# Altium PCB PCB_3U_RJ45.PCBDOC (part 1 of 2)
Units mil, origin at the board's own origin, x right, y up, seen from the top; angles counter-clockwise.
Board outline 2496.06 x 3937 mil, 4 copper layers (TopLayer, MidLayer2, Internal Plane 1, BottomLayer), stack 44.239 mil thick; 189 components, 140 nets, 780 pads, 257 vias.
Unrouted connection lines stored in the file: 406.
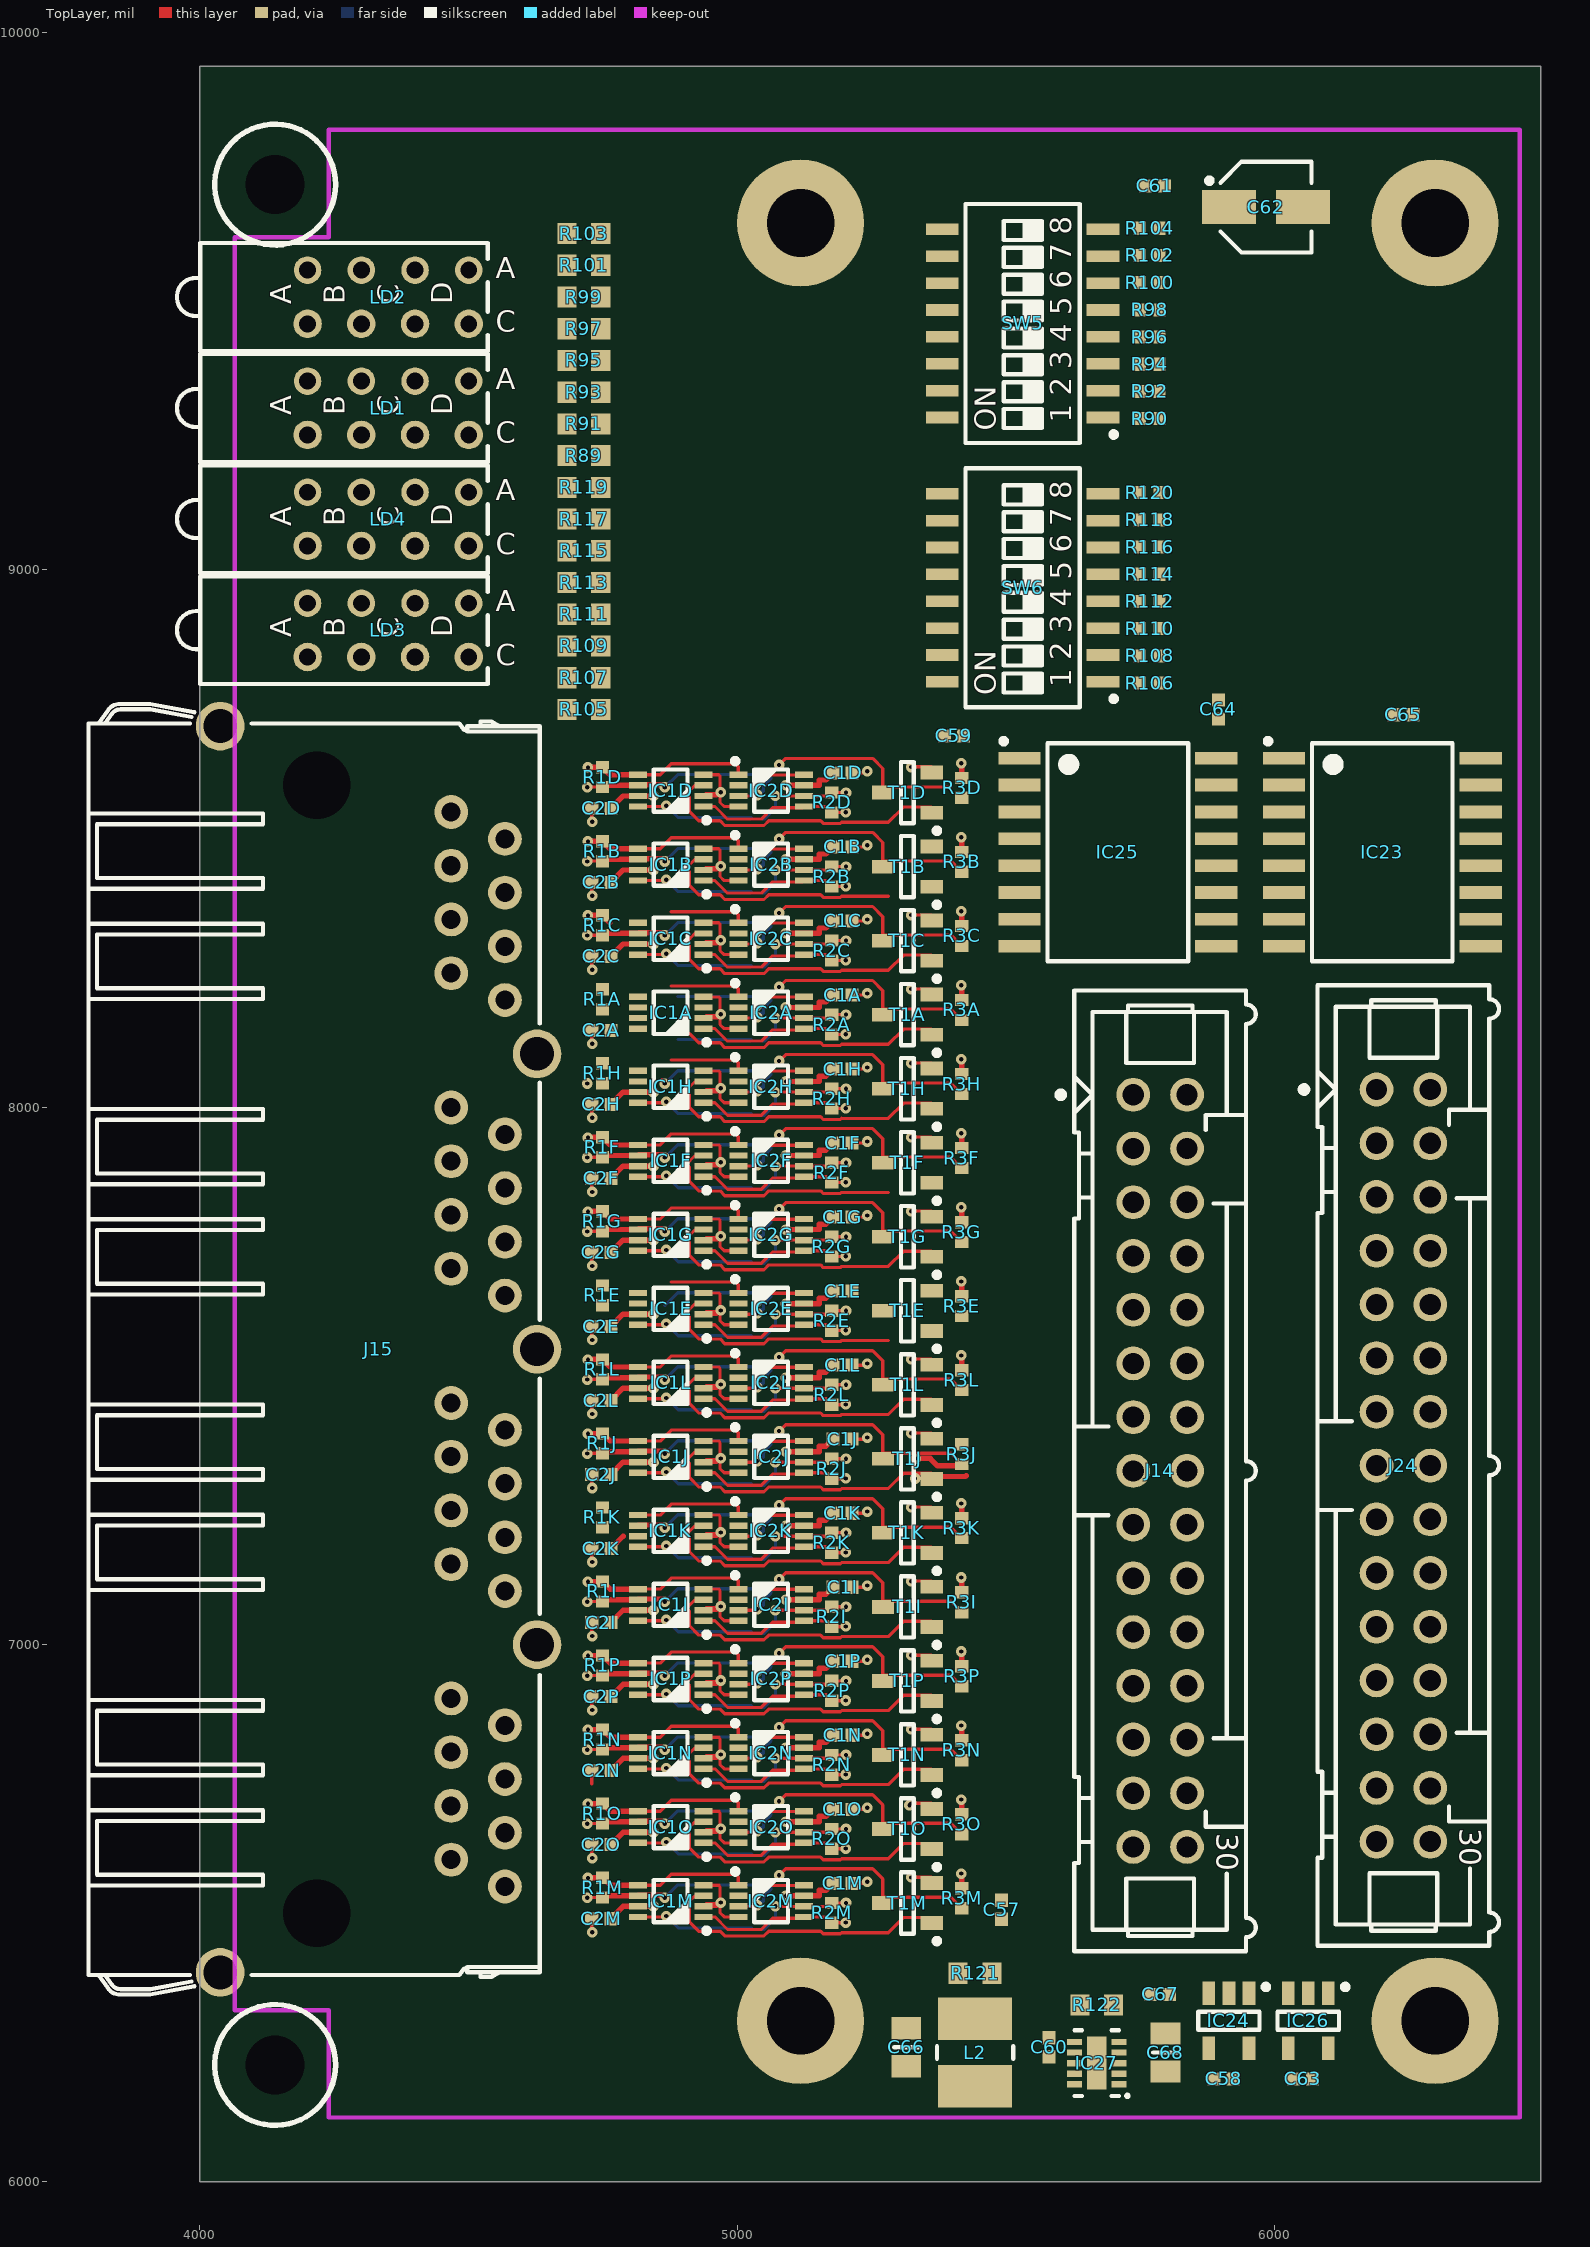
[diagram p0: TopLayer view]
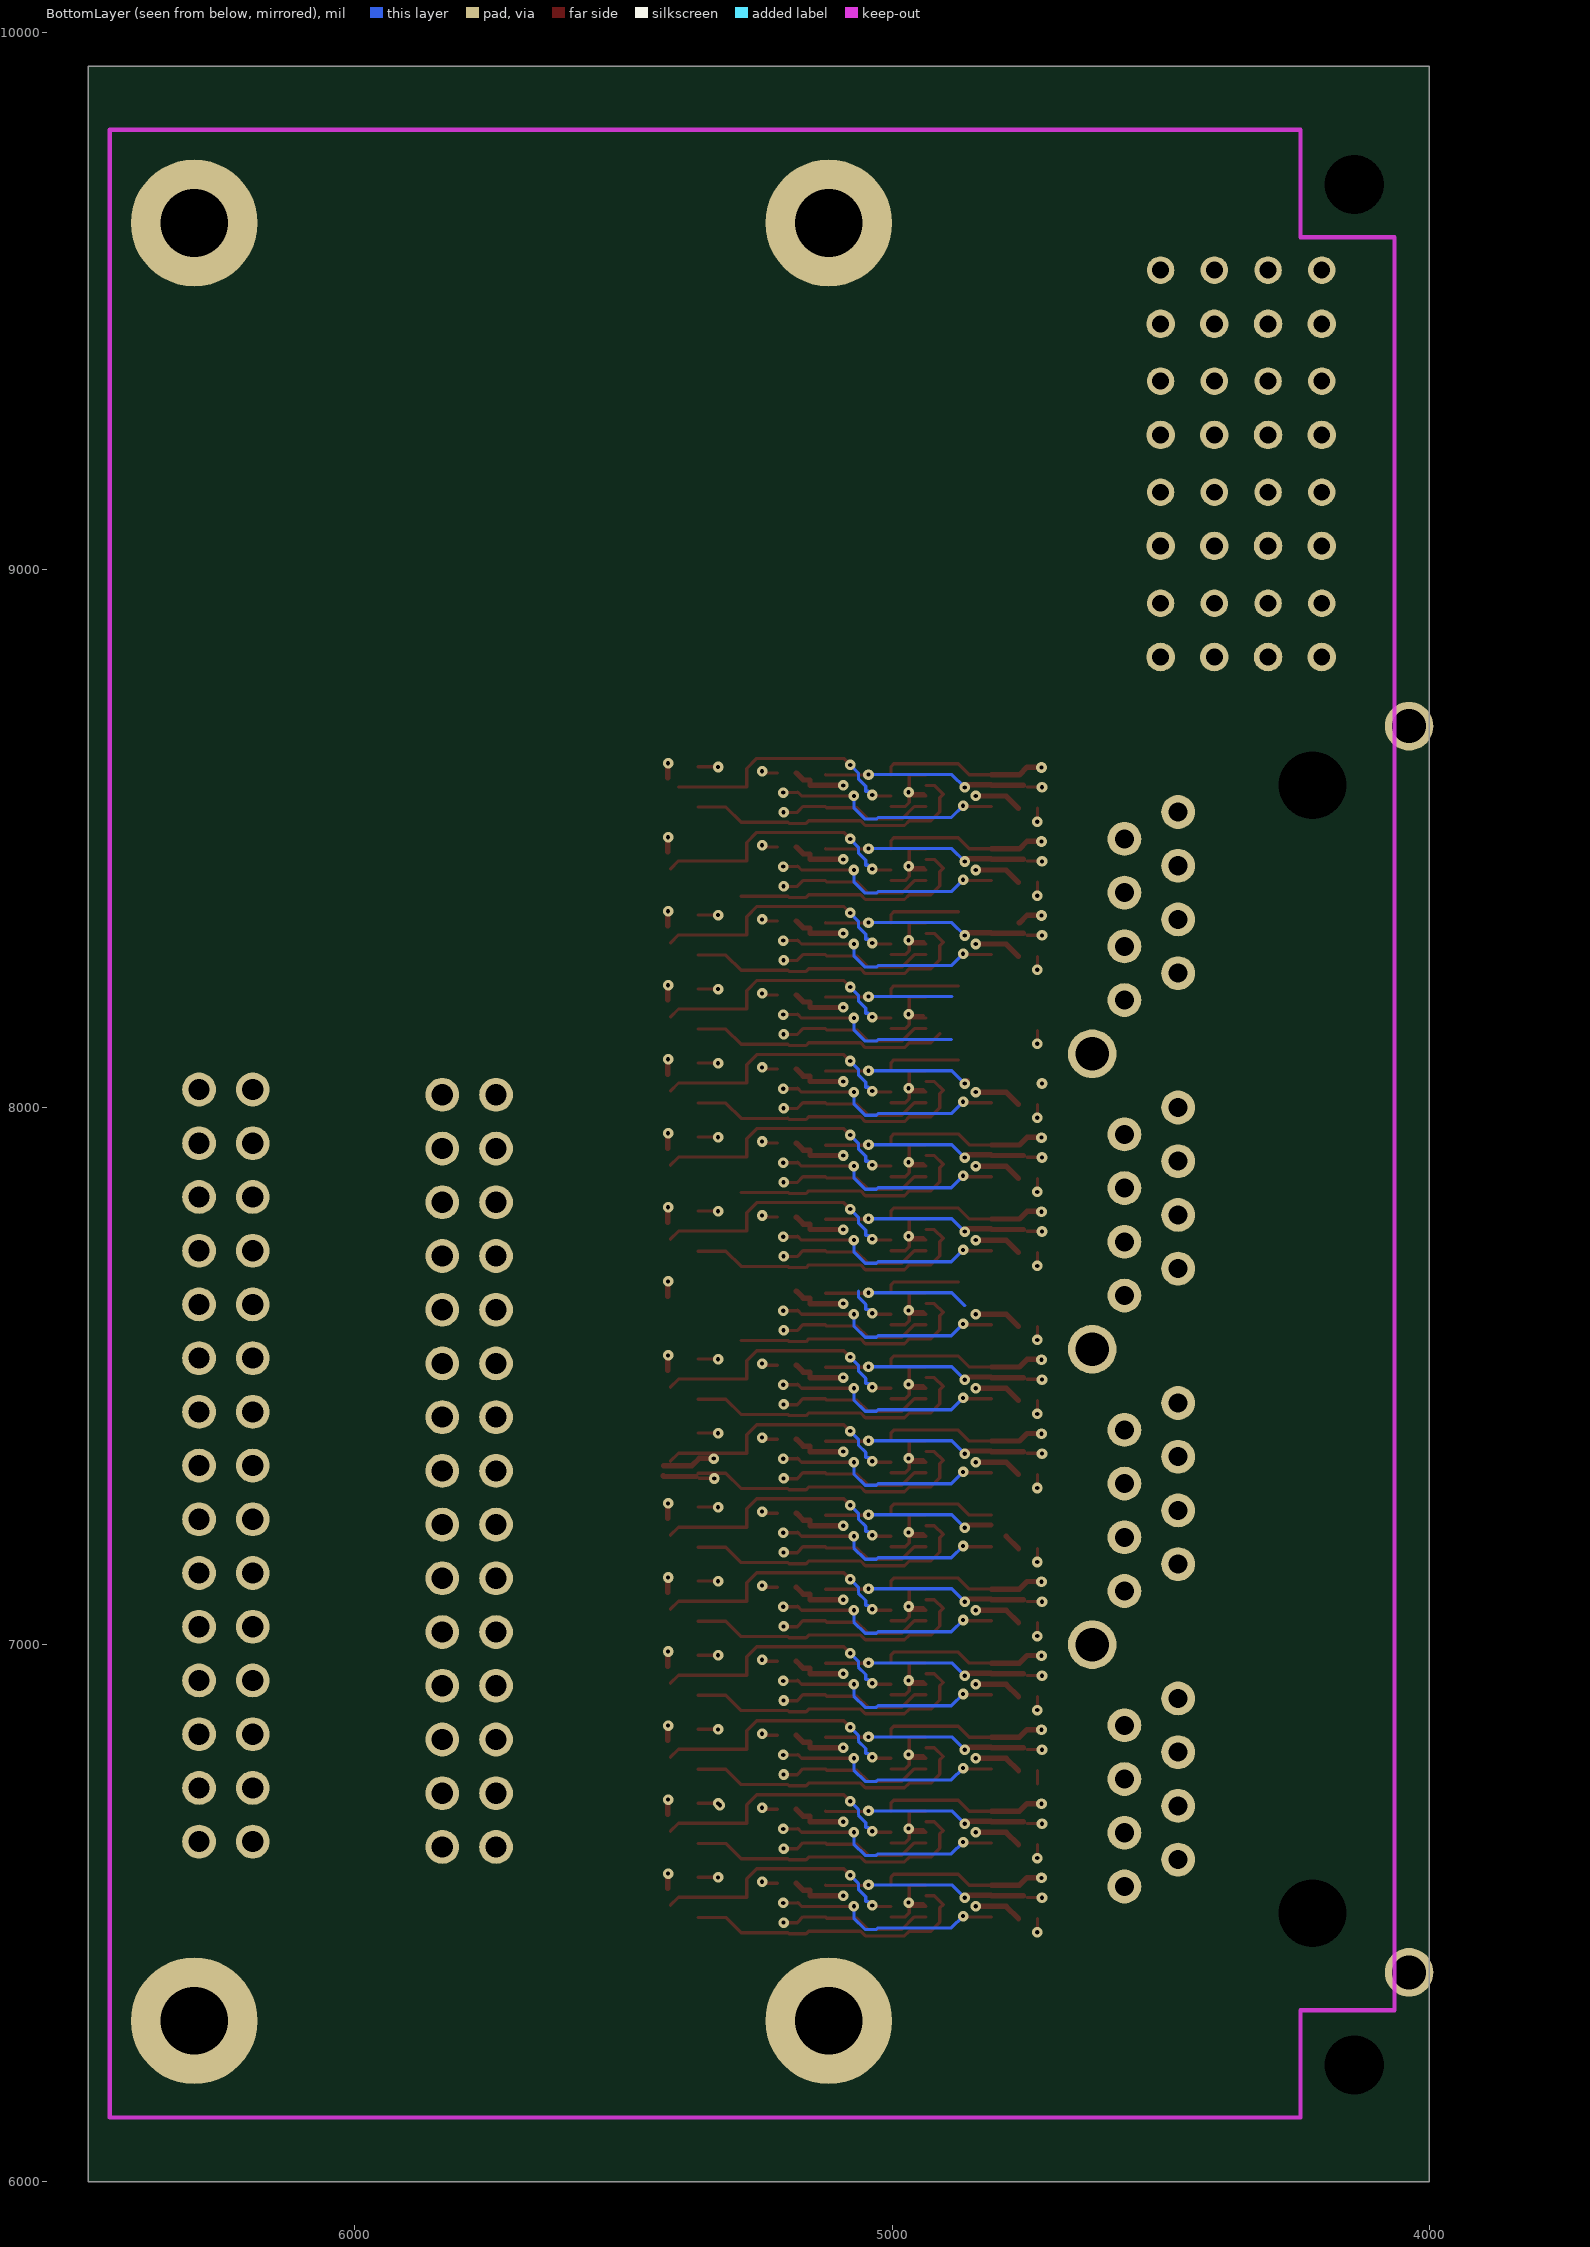
[diagram p1: BottomLayer view, seen from below]
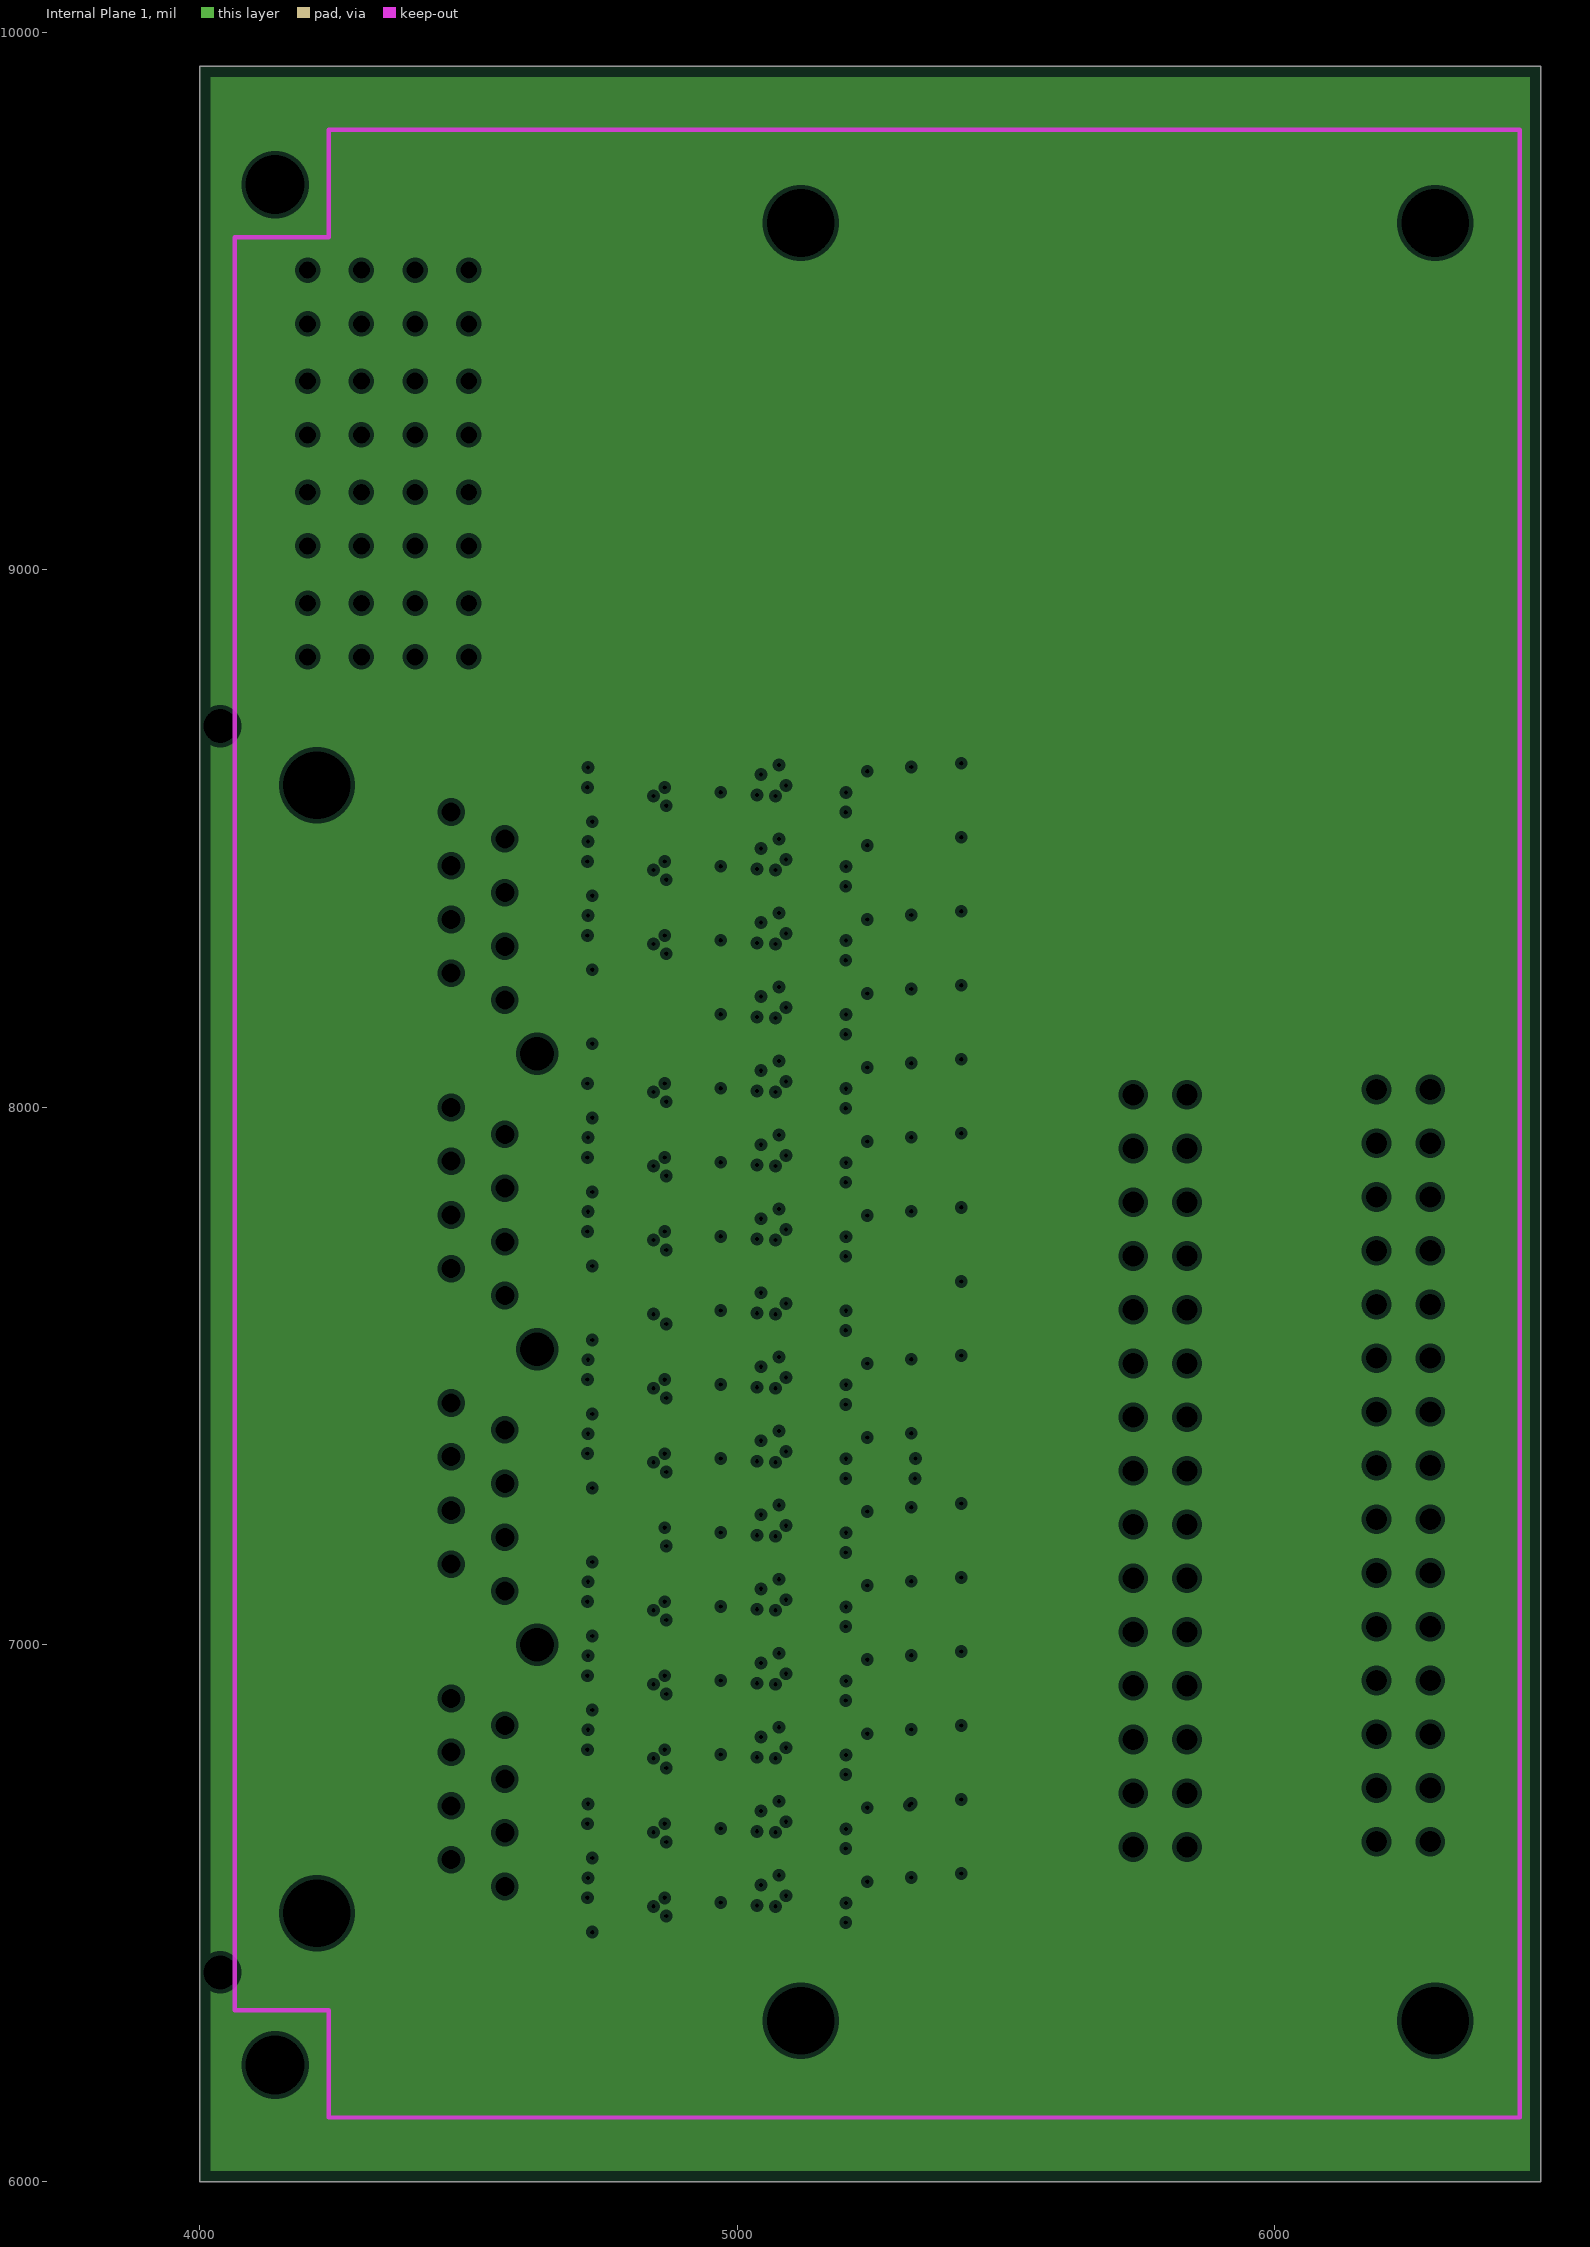
[diagram p2: Internal Plane 1, clearances drawn from the general rule]

## Layer stack, top to bottom
TopSolder: solder mask 0.4, Solder Resist, Dk 3.5
TopLayer: signal copper 1.4
Dielectric1: core 23.622, FR-4, Dk 4.8
MidLayer2: signal copper 1.4
Dielectric 3: prepreg 5, Dk 4.2
Internal Plane 1: plane copper 1.417
Dielectric2: core 10, FR-4, Dk 4.2
BottomLayer: signal copper 1.4
BottomSolder: solder mask 0.4, Solder Resist, Dk 3.5

## Board outline
4000,6000 6496.06,6000 6496.06,9937 4000,9937

## Design rules (kind name [scope] priority, off if disabled: settings)
AcuteAngle [All] p1: minimum=6.00000000000000E+0001 checktracksonly=FALSE
Clearance Clearance_poly [(InPolygon)] p1: gap=23.62
Clearance [All] p2: gap=6
DiffPairsRouting [All] p1: maxlimit=20 minlimit=15 mostfreqgap=17 toplayer_minwidth=15 toplayer_maxwidth=15 toplayer_prefwidth=15 midlayer2_minwidth=15 midlayer2_maxwidth=15 midlayer2_prefwidth=15 bottomlayer_minwidth=15 bottomlayer_maxwidth=15 bottomlayer_prefwidth=15 maxuncoupledlength=500
HoleSize [All] p1: absolutevalues=TRUE maxlimit=200 minlimit=1 maxpercent=80.000 minpercent=20.000
MinimumSolderMaskSliver [All] p1: minsoldermaskwidth=0
MinimumSolderMaskSliver SilkscreenOverComponentPads [All] p2: minsoldermaskwidth=10
PlaneClearance [All] p1: clearance=8
PlaneConnect PlaneConnect_pad [(InPadClass('All Pads'))] p1: planeconnectstyle=Relief reliefexpansion=20 reliefentries=4 reliefconductorwidth=10 reliefairgap=10
PlaneConnect [All] p2: planeconnectstyle=Direct reliefexpansion=20 reliefentries=4 reliefconductorwidth=10 reliefairgap=10
PolygonConnect PolygonConnect_pad [(InPadClass('All Pads'))] p1: connectstyle=Relief reliefconductorwidth=10 reliefentries=4 polygonreliefangle="90 Angle" airgapwidth=10
PolygonConnect [All] p2: connectstyle=Direct reliefconductorwidth=10 reliefentries=4 polygonreliefangle="90 Angle" airgapwidth=10
RoomDefinition U_LVDS_repeater16 [InComponentClass('U_LVDS_repeater16')] p1: confinementstyle=ConfineIn formatcopy=TRUE lockcomponents=FALSE outline 5454.57,7000.73 4706.54,7000.73 4706.54,6862.94 5454.57,6862.94
RoomDefinition U_LVDS_repeater15 [InComponentClass('U_LVDS_repeater15')] p2: confinementstyle=ConfineIn formatcopy=TRUE lockcomponents=FALSE outline 5454.57,6725.14 4706.54,6725.14 4706.54,6587.35 5454.57,6587.35
RoomDefinition U_LVDS_repeater14 [InComponentClass('U_LVDS_repeater14')] p3: confinementstyle=ConfineIn formatcopy=TRUE lockcomponents=FALSE outline 5454.57,6862.94 4706.54,6862.94 4706.54,6725.14 5454.57,6725.14
RoomDefinition U_LVDS_repeater13 [InComponentClass('U_LVDS_repeater13')] p4: confinementstyle=ConfineIn formatcopy=TRUE lockcomponents=FALSE outline 5454.57,6587.35 4706.54,6587.35 4706.54,6449.55 5454.57,6449.55
RoomDefinition U_LVDS_repeater12 [InComponentClass('U_LVDS_repeater12')] p5: confinementstyle=ConfineIn formatcopy=TRUE lockcomponents=FALSE outline 5454.57,7551.91 4706.54,7551.91 4706.54,7414.12 5454.57,7414.12
RoomDefinition U_LVDS_repeater11 [InComponentClass('U_LVDS_repeater11')] p6: confinementstyle=ConfineIn formatcopy=TRUE lockcomponents=FALSE outline 5454.57,7276.32 4706.54,7276.32 4706.54,7138.53 5454.57,7138.53
RoomDefinition U_LVDS_repeater10 [InComponentClass('U_LVDS_repeater10')] p7: confinementstyle=ConfineIn formatcopy=TRUE lockcomponents=FALSE outline 5454.57,7414.12 4706.54,7414.12 4706.54,7276.32 5454.57,7276.32
RoomDefinition U_LVDS_repeater9 [InComponentClass('U_LVDS_repeater9')] p8: confinementstyle=ConfineIn formatcopy=TRUE lockcomponents=FALSE outline 5454.57,7138.53 4706.54,7138.53 4706.54,7000.73 5454.57,7000.73
RoomDefinition U_LVDS_repeater8 [InComponentClass('U_LVDS_repeater8')] p9: confinementstyle=ConfineIn formatcopy=TRUE lockcomponents=FALSE outline 5454.57,8103.09 4706.54,8103.09 4706.54,7965.3 5454.57,7965.3
RoomDefinition U_LVDS_repeater7 [InComponentClass('U_LVDS_repeater7')] p10: confinementstyle=ConfineIn formatcopy=TRUE lockcomponents=FALSE outline 5454.57,7827.5 4706.54,7827.5 4706.54,7689.71 5454.57,7689.71
RoomDefinition U_LVDS_repeater6 [InComponentClass('U_LVDS_repeater6')] p11: confinementstyle=ConfineIn formatcopy=TRUE lockcomponents=FALSE outline 5454.57,7965.3 4706.54,7965.3 4706.54,7827.5 5454.57,7827.5
RoomDefinition U_LVDS_repeater5 [InComponentClass('U_LVDS_repeater5')] p12: confinementstyle=ConfineIn formatcopy=TRUE lockcomponents=FALSE outline 5454.57,7689.71 4706.54,7689.71 4706.54,7551.91 5454.57,7551.91
RoomDefinition U_LVDS_repeater4 [InComponentClass('U_LVDS_repeater4')] p13: confinementstyle=ConfineIn formatcopy=TRUE lockcomponents=FALSE outline 5454.57,8654.28 4706.54,8654.28 4706.54,8516.48 5454.57,8516.48
RoomDefinition U_LVDS_repeater3 [InComponentClass('U_LVDS_repeater3')] p14: confinementstyle=ConfineIn formatcopy=TRUE lockcomponents=FALSE outline 5454.57,8378.69 4706.54,8378.69 4706.54,8240.89 5454.57,8240.89
RoomDefinition U_LVDS_repeater2 [InComponentClass('U_LVDS_repeater2')] p15: confinementstyle=ConfineIn formatcopy=TRUE lockcomponents=FALSE outline 5454.57,8516.48 4706.54,8516.48 4706.54,8378.69 5454.57,8378.69
RoomDefinition U_LVDS_repeater1 [InComponentClass('U_LVDS_repeater1')] p16: confinementstyle=ConfineIn formatcopy=TRUE lockcomponents=FALSE outline 5454.57,8240.89 4706.54,8240.89 4706.54,8103.09 5454.57,8103.09
RoomDefinition PCB_3U_RJ45 [InComponentClass('PCB_3U_RJ45')] p17: confinementstyle=ConfineIn formatcopy=TRUE lockcomponents=FALSE outline 6541,6055 7775.59,6055 7775.59,8581 6541,8581
RoutingVias [All] p1: holewidth=7.87 width=19.68 viastyle="Through Hole" minholewidth=7.87 minwidth=19.68 maxholewidth=19.68 maxwidth=39.37
SilkToSilkClearance [All] p1: silktosilkclearance=0
SolderMaskExpansion [All] p1: expansion=4
ViasUnderSMD ViasUnderSMD_allow [InComponent('IC18') or InComponent('IC10') or InComponent('IC13') or InComponent('IC14') or InComponent('IC15')] p1: allowed=TRUE
ViasUnderSMD [All] p2: allowed=FALSE
Width Width_1 [(InDifferentialPairClass('All Differential Pairs'))] p1: maxlimit=8 minlimit=8 preferedwidth=8
Width [All] p2: maxlimit=100 minlimit=6 preferedwidth=10
24 further rules are at their usual default settings.

## Classes and differential pairs
channel class LVDS_repeater: U_LVDS_repeater1 U_LVDS_repeater2 U_LVDS_repeater3 U_LVDS_repeater4 U_LVDS_repeater5 U_LVDS_repeater6 U_LVDS_repeater7 U_LVDS_repeater8 U_LVDS_repeater9 U_LVDS_repeater10 U_LVDS_repeater11 U_LVDS_repeater12 U_LVDS_repeater13 U_LVDS_repeater14 U_LVDS_repeater15 U_LVDS_repeater16
component class U_LVDS_repeater16: C1P C2P IC1P IC2P R1P R2P R3P T1P
component class U_LVDS_repeater15: C1O C2O IC1O IC2O R1O R2O R3O T1O
component class U_LVDS_repeater14: C1N C2N IC1N IC2N R1N R2N R3N T1N
component class U_LVDS_repeater13: C1M C2M IC1M IC2M R1M R2M R3M T1M
component class U_LVDS_repeater12: C1L C2L IC1L IC2L R1L R2L R3L T1L
component class U_LVDS_repeater11: C1K C2K IC1K IC2K R1K R2K R3K T1K
component class U_LVDS_repeater10: C1J C2J IC1J IC2J R1J R2J R3J T1J
component class U_LVDS_repeater9: C1I C2I IC1I IC2I R1I R2I R3I T1I
component class U_LVDS_repeater8: C1H C2H IC1H IC2H R1H R2H R3H T1H
component class U_LVDS_repeater7: C1G C2G IC1G IC2G R1G R2G R3G T1G
component class U_LVDS_repeater6: C1F C2F IC1F IC2F R1F R2F R3F T1F
component class U_LVDS_repeater5: C1E C2E IC1E IC2E R1E R2E R3E T1E
component class U_LVDS_repeater4: C1D C2D IC1D IC2D R1D R2D R3D T1D
component class U_LVDS_repeater3: C1C C2C IC1C IC2C R1C R2C R3C T1C
component class U_LVDS_repeater2: C1B C2B IC1B IC2B R1B R2B R3B T1B
component class U_LVDS_repeater1: C1A C2A IC1A IC2A R1A R2A R3A T1A
component class PCB_3U_RJ45: C5 C11 C12 C57 C58 C59 C60 C61 C62 C63 C64 C65 C66 C67 C68 IC4 IC23 IC24 IC25 IC26 IC27 J4 J14 J15 J24 L2 LD1 LD2 LD3 LD4 R4 R36 R37 R89 R90 R91 R92 R93 R94 R95 R96 R97 R98 R99 R100 R101 R102 R103 R104 R105 R106 R107 R108 R109 R110 R111 R112 R113 R114 R115 R116 R117 R118 R119 R120 R121 R122 SW5 SW6

## Components (designator, comment, footprint, x,y, rotation, side; value= is the part's Value field where it differs from the comment)
C1A "100nF" CAPC1005X55N 5196.13,8208.58 r180 top (schematic designator C1)
C1B "100nF" CAPC1005X55N 5196.13,8484.17 r180 top (schematic designator C1)
C1C "100nF" CAPC1005X55N 5196.13,8346.38 r180 top (schematic designator C1)
C1D "100nF" CAPC1005X55N 5196.13,8621.97 r180 top (schematic designator C1)
C1E "100nF" CAPC1005X55N 5196.13,7657.4 r180 top (schematic designator C1)
C1F "100nF" CAPC1005X55N 5196.13,7932.99 r180 top (schematic designator C1)
C1G "100nF" CAPC1005X55N 5196.13,7795.2 r180 top (schematic designator C1)
C1H "100nF" CAPC1005X55N 5196.13,8070.79 r180 top (schematic designator C1)
C1I "100nF" CAPC1005X55N 5196.13,7106.22 r180 top (schematic designator C1)
C1J "100nF" CAPC1005X55N 5196.13,7381.81 r180 top (schematic designator C1)
C1K "100nF" CAPC1005X55N 5196.13,7244.02 r180 top (schematic designator C1)
C1L "100nF" CAPC1005X55N 5196.13,7519.61 r180 top (schematic designator C1)
C1M "100nF" CAPC1005X55N 5196.13,6555.04 r180 top (schematic designator C1)
C1N "100nF" CAPC1005X55N 5196.13,6830.63 r180 top (schematic designator C1)
C1O "100nF" CAPC1005X55N 5196.13,6692.83 r180 top (schematic designator C1)
C1P "100nF" CAPC1005X55N 5196.13,6968.43 r180 top (schematic designator C1)
C2A "100nF" CAPC1005X55N 4747.13,8142.74 r0 top (schematic designator C2)
C2B "100nF" CAPC1005X55N 4747.13,8418.33 r0 top (schematic designator C2)
C2C "100nF" CAPC1005X55N 4747.13,8280.54 r0 top (schematic designator C2)
C2D "100nF" CAPC1005X55N 4747.13,8556.13 r0 top (schematic designator C2)
C2E "100nF" CAPC1005X55N 4747.13,7591.56 r0 top (schematic designator C2)
C2F "100nF" CAPC1005X55N 4747.13,7867.15 r0 top (schematic designator C2)
C2G "100nF" CAPC1005X55N 4747.13,7729.35 r0 top (schematic designator C2)
C2H "100nF" CAPC1005X55N 4747.13,8004.94 r0 top (schematic designator C2)
C2I "100nF" CAPC1005X55N 4747.13,7040.38 r0 top (schematic designator C2)
C2J "100nF" CAPC1005X55N 4747.13,7315.97 r0 top (schematic designator C2)
C2K "100nF" CAPC1005X55N 4747.13,7178.17 r0 top (schematic designator C2)
C2L "100nF" CAPC1005X55N 4747.13,7453.76 r0 top (schematic designator C2)
C2M "100nF" CAPC1005X55N 4747.13,6489.2 r0 top (schematic designator C2)
C2N "100nF" CAPC1005X55N 4747.13,6764.79 r0 top (schematic designator C2)
C2O "100nF" CAPC1005X55N 4747.13,6626.99 r0 top (schematic designator C2)
C2P "100nF" CAPC1005X55N 4747.13,6902.58 r0 top (schematic designator C2)
C57 "100nF" CAPC1005X55N 5492.13,6505.91 r270 top
C58 "100nF" CAPC1005X55N 5905.51,6190.94 r180 top
C59 "100nF" CAPC1005X55N 5403.54,8690.94 r180 top
C60 "100nF" CAPC1005X55N 5580.71,6250 r270 top
C61 "100nF" CAPC1005X55N 5777.56,9714.57 r180 top
C62 "10uF" CAPAE430X540N 5984.25,9675.2 r0 top
C63 "100nF" CAPC1005X55N 6053.15,6190.94 r180 top
C64 "100nF" CAPC1005X55N 5895.67,8740.16 r270 top
C65 "100nF" CAPC1005X55N 6240.16,8730.32 r0 top
C66 "22uF" CAPC2012X135N 5314.96,6250 r270 top
C67 "100nF" CAPC1005X55N 5787.4,6348.43 r0 top
C68 "22uF" CAPC2012X135N 5797.24,6240.16 r90 top
IC1A "FIN1101K8X" SOP50P310X90-8N 4876.13,8175.58 r180 top (schematic designator IC1)
IC1B "FIN1101K8X" SOP50P310X90-8N 4876.13,8451.17 r180 top (schematic designator IC1)
IC1C "FIN1101K8X" SOP50P310X90-8N 4876.13,8313.38 r180 top (schematic designator IC1)
IC1D "FIN1101K8X" SOP50P310X90-8N 4876.13,8588.97 r180 top (schematic designator IC1)
IC1E "FIN1101K8X" SOP50P310X90-8N 4876.13,7624.4 r180 top (schematic designator IC1)
IC1F "FIN1101K8X" SOP50P310X90-8N 4876.13,7899.99 r180 top (schematic designator IC1)
IC1G "FIN1101K8X" SOP50P310X90-8N 4876.13,7762.2 r180 top (schematic designator IC1)
IC1H "FIN1101K8X" SOP50P310X90-8N 4876.13,8037.79 r180 top (schematic designator IC1)
IC1I "FIN1101K8X" SOP50P310X90-8N 4876.13,7073.22 r180 top (schematic designator IC1)
IC1J "FIN1101K8X" SOP50P310X90-8N 4876.13,7348.81 r180 top (schematic designator IC1)
IC1K "FIN1101K8X" SOP50P310X90-8N 4876.13,7211.02 r180 top (schematic designator IC1)
IC1L "FIN1101K8X" SOP50P310X90-8N 4876.13,7486.61 r180 top (schematic designator IC1)
IC1M "FIN1101K8X" SOP50P310X90-8N 4876.13,6522.04 r180 top (schematic designator IC1)
IC1N "FIN1101K8X" SOP50P310X90-8N 4876.13,6797.63 r180 top (schematic designator IC1)
IC1O "FIN1101K8X" SOP50P310X90-8N 4876.13,6659.83 r180 top (schematic designator IC1)
IC1P "FIN1101K8X" SOP50P310X90-8N 4876.13,6935.43 r180 top (schematic designator IC1)
IC2A "FIN1101K8X" SOP50P310X90-8N 5063.13,8175.58 r0 top (schematic designator IC2)
IC2B "FIN1101K8X" SOP50P310X90-8N 5063.13,8451.17 r0 top (schematic designator IC2)
IC2C "FIN1101K8X" SOP50P310X90-8N 5063.13,8313.38 r0 top (schematic designator IC2)
IC2D "FIN1101K8X" SOP50P310X90-8N 5063.13,8588.97 r0 top (schematic designator IC2)
IC2E "FIN1101K8X" SOP50P310X90-8N 5063.13,7624.4 r0 top (schematic designator IC2)
IC2F "FIN1101K8X" SOP50P310X90-8N 5063.13,7899.99 r0 top (schematic designator IC2)
IC2G "FIN1101K8X" SOP50P310X90-8N 5063.13,7762.2 r0 top (schematic designator IC2)
IC2H "FIN1101K8X" SOP50P310X90-8N 5063.13,8037.79 r0 top (schematic designator IC2)
IC2I "FIN1101K8X" SOP50P310X90-8N 5063.13,7073.22 r0 top (schematic designator IC2)
IC2J "FIN1101K8X" SOP50P310X90-8N 5063.13,7348.81 r0 top (schematic designator IC2)
IC2K "FIN1101K8X" SOP50P310X90-8N 5063.13,7211.02 r0 top (schematic designator IC2)
IC2L "FIN1101K8X" SOP50P310X90-8N 5063.13,7486.61 r0 top (schematic designator IC2)
IC2M "FIN1101K8X" SOP50P310X90-8N 5063.13,6522.04 r0 top (schematic designator IC2)
IC2N "FIN1101K8X" SOP50P310X90-8N 5063.13,6797.63 r0 top (schematic designator IC2)
IC2O "FIN1101K8X" SOP50P310X90-8N 5063.13,6659.83 r0 top (schematic designator IC2)
IC2P "FIN1101K8X" SOP50P310X90-8N 5063.13,6935.43 r0 top (schematic designator IC2)
IC23 "PCF8574ADW" SOIC127P1030X265-16N 6200.79,8474.41 r0 top
IC24 "24AA02E48T-I/OT" SOT95P280X145-5N 5915.35,6299.21 r270 top
IC25 "PCF8574ADW" SOIC127P1030X265-16N 5708.66,8474.41 r0 top
IC26 "24AA02E48T-I/OT" SOT95P280X145-5N 6062.99,6299.21 r270 top
IC27 "TPS62175DQC" SON50P200X300X80-11N-R94X250 5669.29,6220.47 r180 top
J14 "Familly" 3M_N2530-6002RB 5787.4,7322.83 r270 top
J15 "RJ45" TYCO_5406203-3 4517.72,7549.21 r90 top
J24 "Familly" 3M_N2530-6002RB 6240.16,7332.68 r270 top
L2 "10uH" IND_MURATA-PS_8400 5442.91,6240.16 r270 top
LD1 "Green" LED_BIVAR_H485CGDL 4350.39,9301.18 r0 top
LD2 "Green" LED_BIVAR_H485CGDL 4350.39,9507.87 r0 top
LD3 "Green" LED_BIVAR_H485CGDL 4350.39,8887.8 r0 top
LD4 "Green" LED_BIVAR_H485CGDL 4350.39,9094.49 r0 top
R1A "100" RESC1005X40N 4749.13,8200.74 r270 top (schematic designator R1)
R1B "100" RESC1005X40N 4749.13,8476.33 r270 top (schematic designator R1)
R1C "100" RESC1005X40N 4749.13,8338.54 r270 top (schematic designator R1)
R1D "100" RESC1005X40N 4749.13,8614.13 r270 top (schematic designator R1)
R1E "100" RESC1005X40N 4749.13,7649.56 r270 top (schematic designator R1)
R1F "100" RESC1005X40N 4749.13,7925.15 r270 top (schematic designator R1)
R1G "100" RESC1005X40N 4749.13,7787.35 r270 top (schematic designator R1)
R1H "100" RESC1005X40N 4749.13,8062.94 r270 top (schematic designator R1)
R1I "100" RESC1005X40N 4749.13,7098.38 r270 top (schematic designator R1)
R1J "100" RESC1005X40N 4749.13,7373.97 r270 top (schematic designator R1)
R1K "100" RESC1005X40N 4749.13,7236.17 r270 top (schematic designator R1)
R1L "100" RESC1005X40N 4749.13,7511.76 r270 top (schematic designator R1)
R1M "100" RESC1005X40N 4749.13,6547.2 r270 top (schematic designator R1)
R1N "100" RESC1005X40N 4749.13,6822.79 r270 top (schematic designator R1)
R1O "100" RESC1005X40N 4749.13,6684.99 r270 top (schematic designator R1)
R1P "100" RESC1005X40N 4749.13,6960.58 r270 top (schematic designator R1)
R2A "100" RESC1005X40N 5176.13,8153.58 r270 top (schematic designator R2)
R2B "100" RESC1005X40N 5176.13,8429.17 r270 top (schematic designator R2)
R2C "100" RESC1005X40N 5176.13,8291.38 r270 top (schematic designator R2)
R2D "100" RESC1005X40N 5176.13,8566.97 r270 top (schematic designator R2)
R2E "100" RESC1005X40N 5176.13,7602.4 r270 top (schematic designator R2)
R2F "100" RESC1005X40N 5176.13,7877.99 r270 top (schematic designator R2)
R2G "100" RESC1005X40N 5176.13,7740.2 r270 top (schematic designator R2)
R2H "100" RESC1005X40N 5176.13,8015.79 r270 top (schematic designator R2)
R2I "100" RESC1005X40N 5176.13,7051.22 r270 top (schematic designator R2)
R2J "100" RESC1005X40N 5176.13,7326.81 r270 top (schematic designator R2)
R2K "100" RESC1005X40N 5176.13,7189.02 r270 top (schematic designator R2)
R2L "100" RESC1005X40N 5176.13,7464.61 r270 top (schematic designator R2)
R2M "100" RESC1005X40N 5176.13,6500.04 r270 top (schematic designator R2)
R2N "100" RESC1005X40N 5176.13,6775.63 r270 top (schematic designator R2)
R2O "100" RESC1005X40N 5176.13,6637.83 r270 top (schematic designator R2)
R2P "100" RESC1005X40N 5176.13,6913.43 r270 top (schematic designator R2)
R3A "10k" RESC1005X40N 5418.13,8180.74 r90 top (schematic designator R3)
R3B "10k" RESC1005X40N 5418.13,8456.33 r90 top (schematic designator R3)
R3C "10k" RESC1005X40N 5418.13,8318.54 r90 top (schematic designator R3)
R3D "10k" RESC1005X40N 5418.13,8594.13 r90 top (schematic designator R3)
R3E "10k" RESC1005X40N 5418.13,7629.56 r90 top (schematic designator R3)
R3F "10k" RESC1005X40N 5418.13,7905.15 r90 top (schematic designator R3)
R3G "10k" RESC1005X40N 5418.13,7767.35 r90 top (schematic designator R3)
R3H "10k" RESC1005X40N 5418.13,8042.94 r90 top (schematic designator R3)
R3I "10k" RESC1005X40N 5418.13,7078.38 r90 top (schematic designator R3)
R3J "10k" RESC1005X40N 5418.13,7353.97 r90 top (schematic designator R3)
R3K "10k" RESC1005X40N 5418.13,7216.17 r90 top (schematic designator R3)
R3L "10k" RESC1005X40N 5418.13,7491.76 r90 top (schematic designator R3)
R3M "10k" RESC1005X40N 5418.13,6527.2 r90 top (schematic designator R3)
R3N "10k" RESC1005X40N 5418.13,6802.79 r90 top (schematic designator R3)
R3O "10k" RESC1005X40N 5418.13,6664.99 r90 top (schematic designator R3)
R3P "10k" RESC1005X40N 5418.13,6940.58 r90 top (schematic designator R3)
R89 "220" RESC1608X55N 4714.57,9212.6 r0 top
R90 "10k" RESC1005X40N 5767.72,9281.5 r0 top
R91 "220" RESC1608X55N 4714.57,9271.65 r0 top
R92 "10k" RESC1005X40N 5767.72,9332.11 r0 top
R93 "220" RESC1608X55N 4714.57,9330.71 r0 top
R94 "10k" RESC1005X40N 5767.72,9382.73 r0 top
R95 "220" RESC1608X55N 4714.57,9389.76 r0 top
R96 "10k" RESC1005X40N 5767.72,9433.35 r0 top
R97 "220" RESC1608X55N 4714.57,9448.82 r0 top
R98 "10k" RESC1005X40N 5767.72,9483.97 r0 top
R99 "220" RESC1608X55N 4714.57,9507.87 r0 top
R100 "10k" RESC1005X40N 5767.72,9534.59 r0 top
R101 "220" RESC1608X55N 4714.57,9566.93 r0 top
R102 "10k" RESC1005X40N 5767.72,9585.21 r0 top
R103 "220" RESC1608X55N 4714.57,9625.98 r0 top
R104 "10k" RESC1005X40N 5767.72,9635.83 r0 top
R105 "220" RESC1608X55N 4714.57,8740.16 r0 top
R106 "10k" RESC1005X40N 5767.72,8789.37 r0 top
R107 "220" RESC1608X55N 4714.57,8799.21 r0 top
R108 "10k" RESC1005X40N 5767.72,8839.99 r0 top
R109 "220" RESC1608X55N 4714.57,8858.27 r0 top
R110 "10k" RESC1005X40N 5767.72,8890.61 r0 top
R111 "220" RESC1608X55N 4714.57,8917.32 r0 top
R112 "10k" RESC1005X40N 5767.72,8941.23 r0 top
R113 "220" RESC1608X55N 4714.57,8976.38 r0 top
R114 "10k" RESC1005X40N 5767.72,8991.84 r0 top
R115 "220" RESC1608X55N 4714.57,9035.43 r0 top
R116 "10k" RESC1005X40N 5767.72,9042.46 r0 top
R117 "220" RESC1608X55N 4714.57,9094.49 r0 top
R118 "10k" RESC1005X40N 5767.72,9093.08 r0 top
R119 "220" RESC1608X55N 4714.57,9153.54 r0 top
R120 "10k" RESC1005X40N 5767.72,9143.7 r0 top
R121 "270k" RESC1608X55N 5442.91,6387.8 r180 top
R122 "82k" RESC1608X55N 5669.29,6328.74 r0 top
SW5 "Switch" SW_TYCO_1-1571983-0 5531.5,9458.66 r180 top
SW6 "Switch" SW_TYCO_1-1571983-0 5531.5,8966.54 r180 top
T1A "BSS138LT1G" SOT95P240X110-3N 5316.77,8171.99 r180 top (schematic designator T1)
T1B "BSS138LT1G" SOT95P240X110-3N 5316.77,8447.58 r180 top (schematic designator T1)
T1C "BSS138LT1G" SOT95P240X110-3N 5316.77,8309.79 r180 top (schematic designator T1)
T1D "BSS138LT1G" SOT95P240X110-3N 5316.77,8585.38 r180 top (schematic designator T1)
T1E "BSS138LT1G" SOT95P240X110-3N 5316.77,7620.81 r180 top (schematic designator T1)
T1F "BSS138LT1G" SOT95P240X110-3N 5316.77,7896.4 r180 top (schematic designator T1)
T1G "BSS138LT1G" SOT95P240X110-3N 5316.77,7758.61 r180 top (schematic designator T1)
T1H "BSS138LT1G" SOT95P240X110-3N 5316.77,8034.2 r180 top (schematic designator T1)
T1I "BSS138LT1G" SOT95P240X110-3N 5316.77,7069.63 r180 top (schematic designator T1)
T1J "BSS138LT1G" SOT95P240X110-3N 5316.77,7345.22 r180 top (schematic designator T1)
T1K "BSS138LT1G" SOT95P240X110-3N 5316.77,7207.43 r180 top (schematic designator T1)
T1L "BSS138LT1G" SOT95P240X110-3N 5316.77,7483.02 r180 top (schematic designator T1)
T1M "BSS138LT1G" SOT95P240X110-3N 5316.77,6518.45 r180 top (schematic designator T1)
T1N "BSS138LT1G" SOT95P240X110-3N 5316.77,6794.04 r180 top (schematic designator T1)
T1O "BSS138LT1G" SOT95P240X110-3N 5316.77,6656.24 r180 top (schematic designator T1)
T1P "BSS138LT1G" SOT95P240X110-3N 5316.77,6931.83 r180 top (schematic designator T1)

## Footprints (in the part's own frame and the unit in brackets; to place one, negate y for a bottom-side part, rotate by r counter-clockwise, add the part's x,y. Pads: shape width x height; smd on the part's side, far side on the other; paste and mask are expansions set on the pad)
3M_N2530-6002RB [mm] "30 Contacts - Straight .100\" x .100\" Low Profile Four-Wall Header"
  round 1.6 hole 1: 1(-17.78,-1.27) 2(-17.78,1.27) 3(-15.24,-1.27) 4(-15.24,1.27) 5(-12.7,-1.27) 6(-12.7,1.27) 7(-10.16,-1.27) 8(-10.16,1.27) 9(-7.62,-1.27) 10(-7.62,1.27) 11(-5.08,-1.27) 12(-5.08,1.27) 13(-2.54,-1.27) 14(-2.54,1.27) 15(0,-1.27) 16(0,1.27) 17(2.54,-1.27) 18(2.54,1.27) 19(5.08,-1.27) 20(5.08,1.27) 21(7.62,-1.27) 22(7.62,1.27) 23(10.16,-1.27) 24(10.16,1.27) 25(12.7,-1.27) 26(12.7,1.27) 27(15.24,-1.27) 28(15.24,1.27) 29(17.78,-1.27) 30(17.78,1.27)
  silkscreen extent -22.71,-4.85 22.71,4.52, body extent -22.71,-4.11 22.71,4.52, height 9.91
CAPAE430X540N [mm] "Capacitor, Aluminium Electrolytric, 4.3mm L X 4.3mm W X 5.4mm H, IPC Medium Density"
  rect 2.55x1.6 smd: 1(-1.75,0) 2(1.75,0)
  silkscreen extent -2.8,-2.15 2.15,2.15, body extent -2.75,-2.25 2.75,2.25, height 5.7
CAPC1005X55N [mm] "Chip Capacitor, Body 1.0x0.55mm, IPC Medium Density"
  rect 0.62x0.62 smd: 1(-0.45,0) 2(0.45,0)
  body extent -0.52,-0.27 0.53,0.28, height 0.55
CAPC2012X135N [mm] "Chip Capacitor, Body 2.0x1.25mm, IPC Medium Density"
  rect 1.05x1.4 smd: 1(-0.9,0) 2(0.9,0)
  silkscreen extent 0,-0.58 0,0.58, body extent -1.05,-0.67 1.05,0.68, height 1.25
IND_MURATA-PS_8400 [mm] "Miniature Surface Mount Power Inductors, 4.5mm L X 3.3mm W X 2.9mm H, MURATA 8400 Serie"
  rect 2x3.5 smd: 1(-1.6,0) 2(1.6,0)
  silkscreen extent -0.3,-1.8 0.3,1.8, body extent -2.4,-1.8 2.4,1.8, height 2.9
LED_BIVAR_H485CGDL [mm] "Quad-Level 2mm Green, PCB Edge Mounting  BIVAR H485CGDL"
  round 1.35 hole 0.8: 1(-3.81,-1.27) 3(-1.27,-1.27) 5(1.27,-1.27) 7(3.81,-1.27)
  round 1.3 hole 0.8: 2(-3.81,1.27) 4(-1.27,1.27) 6(1.27,1.27) 8(3.81,1.27)
  silkscreen extent -9.99,-2.55 4.71,2.55, body extent -9.99,-2.55 4.71,2.55, height 11.3
RESC1005X40N [mm] "Chip Resistor, EIA 0402, Metric 1005, Body 1.0x0.5mm, IPC Medium Density"
  rect 0.58x0.62 smd: 1(-0.47,0) 2(0.47,0)
  body extent -0.52,-0.27 0.53,0.28, height 0.4
RESC1608X55N [mm] "Chip Resistor, EIA 0603, Metric 1608, Body 1.6x0.8mm, IPC Medium Density"
  rect 0.9x1 smd: 1(-0.8,0) 2(0.8,0)
  body extent -0.87,-0.47 0.88,0.48, height 0.55
SOIC127P1030X265-16N [mm] "SOIC 16, Pitch 1.27mm - Body 7.5x10.3mm, IPC Medium Density"
  rect 2x0.6 smd: 1(-4.65,4.445) 2(-4.65,3.175) 3(-4.65,1.905) 4(-4.65,0.635) 5(-4.65,-0.635) 6(-4.65,-1.905) 7(-4.65,-3.175) 8(-4.65,-4.445) 9(4.65,-4.445) 10(4.65,-3.175) 11(4.65,-1.905) 12(4.65,-0.635) 13(4.65,0.635) 14(4.65,1.905) 15(4.65,3.175) 16(4.65,4.445)
  silkscreen extent -5.52,-5.15 3.32,5.37, body extent -5.18,-5.25 5.18,5.25, height 1.68
SON50P200X300X80-11N-R94X250 [mm] "SON, 10-Leads, Body 2x3mm, Pitch 0.5mm, Thermal Pad 0.94x2.5mm, IPC Medium Density"
  rect 0.7x0.3 smd: 1(-1.05,1) 2(-1.05,0.5) 3(-1.05,0) 4(-1.05,-0.5) 5(-1.05,-1) 6(1.05,-1) 7(1.05,-0.5) 8(1.05,0) 9(1.05,0.5) 10(1.05,1)
  rect 0.94x2.5 smd: 11(0,0)
  silkscreen extent -1.5,-1.55 1.05,1.6, body extent -1.05,-1.55 1.05,1.55, height 0.8
SOP50P310X90-8N [mm] "SOP, 0.50mm pitch; 8 pin, 2.30mm W X 2.00mm L X 0.90mm H body, PC Medium Density"
  rect 0.85x0.3 smd: 1(-1.55,0.75) 2(-1.55,0.25) 3(-1.55,-0.25) 4(-1.55,-0.75) 5(1.55,-0.75) 6(1.55,-0.25) 7(1.55,0.25) 8(1.55,0.75)
  silkscreen extent -1.83,-1 0.8,1.52, body extent -1.62,-1 1.62,1, height 0.9
SOT95P240X110-3N [mm] "SOT23 3-Leads, Pitch 0.95mm, Body 1.3x2.9mm, IPC Medium Density"
  rect 1.05x0.65 smd: 1(-1.15,0.95) 2(-1.15,-0.95) 3(1.15,0)
  silkscreen extent -1.53,-1.45 0.3,1.92, body extent -1.25,-1.5 1.25,1.5, height 1.1
SOT95P280X145-5N [mm] "SOT, 0.95mm pitch; 5 pin, 1.60mm W X 2.90mm L X 1.45mm H body, IPC Medium Density"
  rect 1.1x0.6 smd: 1(-1.3,0.95) 2(-1.3,0) 3(-1.3,-0.95) 4(1.3,-0.95) 5(1.3,0.95)
  silkscreen extent -1.72,-1.45 0.43,1.88, body extent -1.4,-1.5 1.4,1.5, height 1.45
SW_TYCO_1-1571983-0 [mm] "Pitch 1.27mm,  Body 11.28x6.2mm, 8 Ways SPST Surface-Mount DIP Switch, TYCO GDH Serie"
  rect 1.55x0.55 smd: 1(-3.8,4.445) 2(-3.8,3.175) 3(-3.8,1.905) 4(-3.8,0.635) 5(-3.8,-0.635) 6(-3.8,-1.905) 7(-3.8,-3.175) 8(-3.8,-4.445) 9(3.8,-4.445) 10(3.8,-3.175) 11(3.8,-1.905) 12(3.8,-0.635) 13(3.8,0.635) 14(3.8,1.905) 15(3.8,3.175) 16(3.8,4.445)
  silkscreen extent -4.43,-5.65 2.7,5.65, body extent -4.06,-5.64 4.06,5.64, height 2.36
TYCO_5406203-3 [mm] "4 x RJ45 Jacks - 8 Positions"
  round 1.6 hole 0.9: 1A(-16.51,1.27) 1B(-2.54,1.27) 1C(11.43,1.27) 1D(25.4,1.27) 2A(-17.78,-1.27) 2B(-3.81,-1.27) 2C(10.16,-1.27) 2D(24.13,-1.27) 3A(-19.05,1.27) 3B(-5.08,1.27) 3C(8.89,1.27) 3D(22.86,1.27) 4A(-20.32,-1.27) 4B(-6.35,-1.27) 4C(7.62,-1.27) 4D(21.59,-1.27) 5A(-21.59,1.27) 5B(-7.62,1.27) 5C(6.35,1.27) 5D(20.32,1.27) 6A(-22.86,-1.27) 6B(-8.89,-1.27) 6C(5.08,-1.27) 6D(19.05,-1.27) 7A(-24.13,1.27) 7B(-10.16,1.27) 7C(3.81,1.27) 7D(17.78,1.27) 8A(-25.4,-1.27) 8B(-11.43,-1.27) 8C(2.54,-1.27) 8D(16.51,-1.27)
  round 1 hole 3.2 unplated mask+1.35: M1(26.67,7.62) M2(-26.67,7.62)
  round 2.3 hole 1.6: SH(-29.46,12.19) SH(-13.97,-2.792) SH(0,-2.792) SH(13.97,-2.792) SH(29.46,12.19)
  silkscreen extent -30.51,-2.92 30.51,18.42, body extent -30.51,-2.92 30.51,18.42, height 14.55

## Part data
C1A C1B C1C C1D C1E C1F C1G C1H C1I C1J C1K C1L C1M C1N C1O C1P C2A C2B C2C C2D C2E C2F C2G C2H C2I C2J C2K C2L C2M C2N C2O C2P C57 C58 C59 C60 C61 C63 C64 C65 C67: library part CC0402_100NF_16V_10%_X5R, "Non-polarised capacitor"
C62: library part CAE430-540_10UF_16V_20%, "Polarised capacitor"
C66 C68: library part CC0805_22UF_16V_10%_X5R, "Non-polarised capacitor"
IC1A IC1B IC1C IC1D IC1E IC1F IC1G IC1H IC1I IC1J IC1K IC1L IC1M IC1N IC1O IC1P IC2A IC2B IC2C IC2D IC2E IC2F IC2G IC2H IC2I IC2J IC2K IC2L IC2M IC2N IC2O IC2P: "LVDS Single Port High Speed Repeater"
IC23 IC25: "Remote 8-bit I/O Expander For I2C Bus"
IC24 IC26: "1.7V-5.5V, 2K I2C Serial EEPROM With EUI-48 Node Identity"
IC27: "4.75-28VDC to 1-6VDC, 500mA Step-Down Converter With Sleep Mode"
J14 J24: library part 3M_N2530-6002RB, "Connector 30 Male"
J15: library part TYCO_5406203-3, "Connector 4 x RJ45 + Shield"
L2: library part IND_10UH_10%_MURATA-PS_8400, "Inductor With Core"
LD1 LD2 LD3 LD4: library part LED_BIVAR_H485CGDL, "LED x4 Green 1C2A-BOT_3C4A_5C6A_7C8A-TOP"
R1A R1B R1C R1D R1E R1F R1G R1H R1I R1J R1K R1L R1M R1N R1O R1P R2A R2B R2C R2D R2E R2F R2G R2H R2I R2J R2K R2L R2M R2N R2O R2P: library part R0402_100R_1%_0.1W_100PPM, "Resistor - 1%"
R3A R3B R3C R3D R3E R3F R3G R3H R3I R3J R3K R3L R3M R3N R3O R3P R90 R92 R94 R96 R98 R100 R102 R104 R106 R108 R110 R112 R114 R116 R118 R120: library part R0402_10K_1%_0.0625W_100PPM, "Resistor - 1%"
R89 R91 R93 R95 R97 R99 R101 R103 R105 R107 R109 R111 R113 R115 R117 R119: library part R0603_220R_1%_0.1W_100PPM, "Resistor - 1%"
R121: library part R0603_270K_1%_0.1W_100PPM, "Resistor - 1%"
R122: library part R0603_82K_1%_0.1W_100PPM, "Resistor - 1%"
SW5 SW6: library part SW_TYCO_1-1571983-0, "8 Ways SPST DIP Switch"
T1A T1B T1C T1D T1E T1F T1G T1H T1I T1J T1K T1L T1M T1N T1O T1P: "N-CHANNEL MOSFET WITH DIODE"

## Free pads (board coordinates)
  round 236.22 hole 125.98: 0(6299.21,6299.21) 1(6299.21,9645.67) 2(5118.11,9645.67) 3(5118.11,6299.21)
  round 50 hole 110: 1(4140,9717) 2(4140,6217)

## Via types
v1: diameter 19.68, hole 7.87, TopLayer to BottomLayer, 257 vias

## Nets (pads, with @x,y where several pads share a name; then routed paths per layer and width w, separated by ;. In a path a pad name is that pad's centre, name@x,y a point inside that pad or via, vN(x,y) a via of type N, cw(c..) or ccw(c..) an arc to the next point about the centre after c; other vN are vias at no path point)
DIR1: IC1P.3 T1P.1 | length 553.1
  TopLayer w6: IC1P.3@4937.15,6945.27 4921.47,6945.27 4905.13,6928.92 4911.42,6922.63 4911.42,6896.26 4928.26,6879.43 4968.19,6879.43 4977.03,6870.58 5049.9,6870.58 5058.74,6879.43 5155.27,6879.43 5160.19,6874.5 5192.06,6874.5 5194.23,6876.67 5194.32,6876.58 5281.28,6876.58 5309.72,6905.02 T1P.1@5361.4,6905.02
DIR2: IC1O.3 T1O.1 | length 553.1
  TopLayer w6: IC1O.3@4937.15,6669.68 4921.47,6669.68 4905.13,6653.33 4911.42,6647.04 4911.42,6620.67 4928.26,6603.83 4968.19,6603.83 4977.03,6594.99 5049.9,6594.99 5058.74,6603.83 5155.27,6603.83 5160.19,6598.91 5192.06,6598.91 5194.23,6601.08 5194.32,6600.99 5281.28,6600.99 5309.72,6629.43 T1O.1@5361.4,6629.43
DIR3: IC1N.3 T1N.1 | length 553.1
  TopLayer w6: IC1N.3@4937.15,6807.47 4921.47,6807.47 4905.13,6791.13 4911.42,6784.84 4911.42,6758.47 4928.26,6741.63 4968.19,6741.63 4977.03,6732.79 5049.9,6732.79 5058.74,6741.63 5155.27,6741.63 5160.19,6736.71 5192.06,6736.71 5194.23,6738.88 5194.32,6738.79 5281.28,6738.79 5309.72,6767.23 T1N.1@5361.4,6767.23
DIR4: IC1M.3 T1M.1 | length 553.1
  TopLayer w6: IC1M.3@4937.15,6531.88 4921.47,6531.88 4905.13,6515.54 4911.42,6509.25 4911.42,6482.88 4928.26,6466.04 4968.19,6466.04 4977.03,6457.2 5049.9,6457.2 5058.74,6466.04 5155.27,6466.04 5160.19,6461.12 5192.06,6461.12 5194.23,6463.29 5194.32,6463.2 5281.28,6463.2 5309.72,6491.64 T1M.1@5361.4,6491.64
DIR5: IC1L.3 T1L.1 | length 553.1
  TopLayer w6: IC1L.3@4937.15,7496.45 4921.47,7496.45 4905.13,7480.11 4911.42,7473.81 4911.42,7447.45 4928.26,7430.61 4968.19,7430.61 4977.03,7421.76 5049.9,7421.76 5058.74,7430.61 5155.27,7430.61 5160.19,7425.69 5192.06,7425.69 5194.23,7427.86 5194.32,7427.76 5281.28,7427.76 5309.72,7456.2 T1L.1@5361.4,7456.2
DIR6: IC1K.3 T1K.1 | length 553.1
  TopLayer w6: IC1K.3@4937.15,7220.86 4921.47,7220.86 4905.13,7204.52 4911.42,7198.22 4911.42,7171.85 4928.26,7155.02 4968.19,7155.02 4977.03,7146.17 5049.9,7146.17 5058.74,7155.02 5155.27,7155.02 5160.19,7150.09 5192.06,7150.09 5194.23,7152.27 5194.32,7152.17 5281.28,7152.17 5309.72,7180.61 T1K.1@5361.4,7180.61
DIR7: IC1J.3 T1J.1 | length 962.7
  TopLayer w6: IC1J.3@4937.15,7358.65 4921.47,7358.65 4905.13,7342.31 4911.42,7336.02 4911.42,7309.65 4928.26,7292.81 4968.19,7292.81 4977.03,7283.97 5049.9,7283.97 5058.74,7292.81 5155.27,7292.81 5160.19,7287.89 5192.06,7287.89 5194.23,7290.06 5194.32,7289.97 5281.28,7289.97 5309.72,7318.41 T1J.1@5361.4,7318.41 ; v1(5044.13,7241.02) 5044.97,7240.17 5123.78,7240.17 5124.15,7240.54 ; v1(5331.12,7308.69) 5331.61,7309.19 T1J.1@5359.12,7309.19
  TopLayer w10: 4816.26,7222.02 4860.13,7222.02 v1(4865.13,7217.02) ; T1J.1@5365.77,7312.38 5425.09,7312.38 5426.25,7313.54
  BottomLayer w6: v1(4865.13,7217.02) 4889.13,7241.02 v1(5044.13,7241.02)
DIR8: IC1I.3 T1I.1 | length 553.1
  TopLayer w6: IC1I.3@4937.15,7083.06 4921.47,7083.06 4905.13,7066.72 4911.42,7060.43 4911.42,7034.06 4928.26,7017.22 4968.19,7017.22 4977.03,7008.38 5049.9,7008.38 5058.74,7017.22 5155.27,7017.22 5160.19,7012.3 5192.06,7012.3 5194.23,7014.47 5194.32,7014.38 5281.28,7014.38 5309.72,7042.82 T1I.1@5361.4,7042.82
DIR9: IC1H.3 T1H.1 | length 553.1
  TopLayer w6: IC1H.3@4937.15,8047.63 4921.47,8047.63 4905.13,8031.29 4911.42,8025 4911.42,7998.63 4928.26,7981.79 4968.19,7981.79 4977.03,7972.94 5049.9,7972.94 5058.74,7981.79 5155.27,7981.79 5160.19,7976.87 5192.06,7976.87 5194.23,7979.04 5194.32,7978.94 5281.28,7978.94 5309.72,8007.39 T1H.1@5361.4,8007.39
DIR10: IC1G.3 T1G.1 | length 553.1
  TopLayer w6: IC1G.3@4937.15,7772.04 4921.47,7772.04 4905.13,7755.7 4911.42,7749.41 4911.42,7723.04 4928.26,7706.2 4968.19,7706.2 4977.03,7697.35 5049.9,7697.35 5058.74,7706.2 5155.27,7706.2 5160.19,7701.28 5192.06,7701.28 5194.23,7703.45 5194.32,7703.35 5281.28,7703.35 5309.72,7731.8 T1G.1@5361.4,7731.8
DIR11: IC1F.3 T1F.1 | length 603.7
  TopLayer w6: 4877.13,8087.79 4997.13,8087.79 5002.1,8082.81 5002.1,8067.31 ; IC1F.3@4937.15,7909.83 4921.47,7909.83 4905.13,7893.49 4911.42,7887.2 4911.42,7860.83 4928.26,7843.99 4968.19,7843.99 4977.03,7835.15 5049.9,7835.15 5058.74,7843.99 5155.27,7843.99 5160.19,7839.07 5192.06,7839.07 5194.23,7841.24 5194.32,7841.15 5281.28,7841.15
DIR12: IC1E.3 T1E.1 | length 461.2
  TopLayer w6: IC1E.3@4937.15,7634.24 4921.47,7634.24 4905.13,7617.9 4911.42,7611.61 4911.42,7585.24 4928.26,7568.4 4968.19,7568.4 4977.03,7559.56 5049.9,7559.56 5058.74,7568.4 5155.27,7568.4 5160.19,7563.48 5192.06,7563.48 5194.23,7565.65 5194.32,7565.56 5281.28,7565.56
DIR13: IC1D.3 T1D.1 | length 553.1
  TopLayer w6: IC1D.3@4937.15,8598.81 4921.47,8598.81 4905.13,8582.47 4911.42,8576.18 4911.42,8549.81 4928.26,8532.97 4968.19,8532.97 4977.03,8524.13 5049.9,8524.13 5058.74,8532.97 5155.27,8532.97 5160.19,8528.05 5192.06,8528.05 5194.23,8530.22 5194.32,8530.13 5281.28,8530.13 5309.72,8558.57 T1D.1@5361.4,8558.57
DIR14: IC1C.3 T1C.1 | length 553.1
  TopLayer w6: IC1C.3@4937.15,8323.22 4921.47,8323.22 4905.13,8306.88 4911.42,8300.59 4911.42,8274.22 4928.26,8257.38 4968.19,8257.38 4977.03,8248.54 5049.9,8248.54 5058.74,8257.38 5155.27,8257.38 5160.19,8252.46 5192.06,8252.46 5194.23,8254.63 5194.32,8254.54 5281.28,8254.54 5309.72,8282.98 T1C.1@5361.4,8282.98
DIR15: IC1B.3 T1B.1 | length 730.1
  TopLayer w6: IC1B.3@4937.15,8461.02 4921.47,8461.02 4905.13,8444.67 4911.42,8438.38 4911.42,8412.01 4928.26,8395.17 4968.19,8395.17 4977.03,8386.33 5049.9,8386.33 5058.74,8395.17 5155.27,8395.17 5160.19,8390.25 5192.06,8390.25 5194.23,8392.42 5194.32,8392.33 5281.28,8392.33 ; v1(5044.13,7654.4) 5044.97,7653.56 5123.78,7653.56
  BottomLayer w6: 4865.13,7630.4 4889.13,7654.4 v1(5044.13,7654.4)
DIR16: IC1A.3 T1A.1 | length 479
  TopLayer w6: 4911.42,8136.42 4928.26,8119.58 4968.19,8119.58 4977.03,8110.74 5049.9,8110.74 5058.74,8119.58 5155.27,8119.58 5160.19,8114.66 5192.06,8114.66 5194.23,8116.83 5194.32,8116.74 5281.28,8116.74 5309.72,8145.18 T1A.1@5361.4,8145.18
DIR_CTRL1: IC23.4 R89.2 R90.1 SW5.1
DIR_CTRL2: IC23.5 R91.2 R92.1 SW5.2
DIR_CTRL3: IC23.6 R93.2 R94.1 SW5.3
DIR_CTRL4: IC23.7 R95.2 R96.1 SW5.4
DIR_CTRL5: IC23.9 R97.2 R98.1 SW5.5
DIR_CTRL6: IC23.10 R99.2 R100.1 SW5.6
DIR_CTRL7: IC23.11 R101.2 R102.1 SW5.7
DIR_CTRL8: IC23.12 R103.2 R104.1 SW5.8
DIR_CTRL9: IC25.4 R105.2 R106.1 SW6.1
DIR_CTRL10: IC25.5 R107.2 R108.1 SW6.2
DIR_CTRL11: IC25.6 R109.2 R110.1 SW6.3
DIR_CTRL12: IC25.7 R111.2 R112.1 SW6.4
DIR_CTRL13: IC25.9 R113.2 R114.1 SW6.5
DIR_CTRL14: IC25.10 R115.2 R116.1 SW6.6
DIR_CTRL15: IC25.11 R117.2 R118.1 SW6.7
DIR_CTRL16: IC25.12 R119.2 R120.1 SW6.8